# Altium PCB board.pcbdoc
Units mil, origin at the board's own origin, x right, y up, seen from the top; angles counter-clockwise.
Board outline 2650 x 4410 mil, 2 copper layers (Top Layer, Bottom Layer); 12 components, 12 nets, 107 pads, 2 vias.
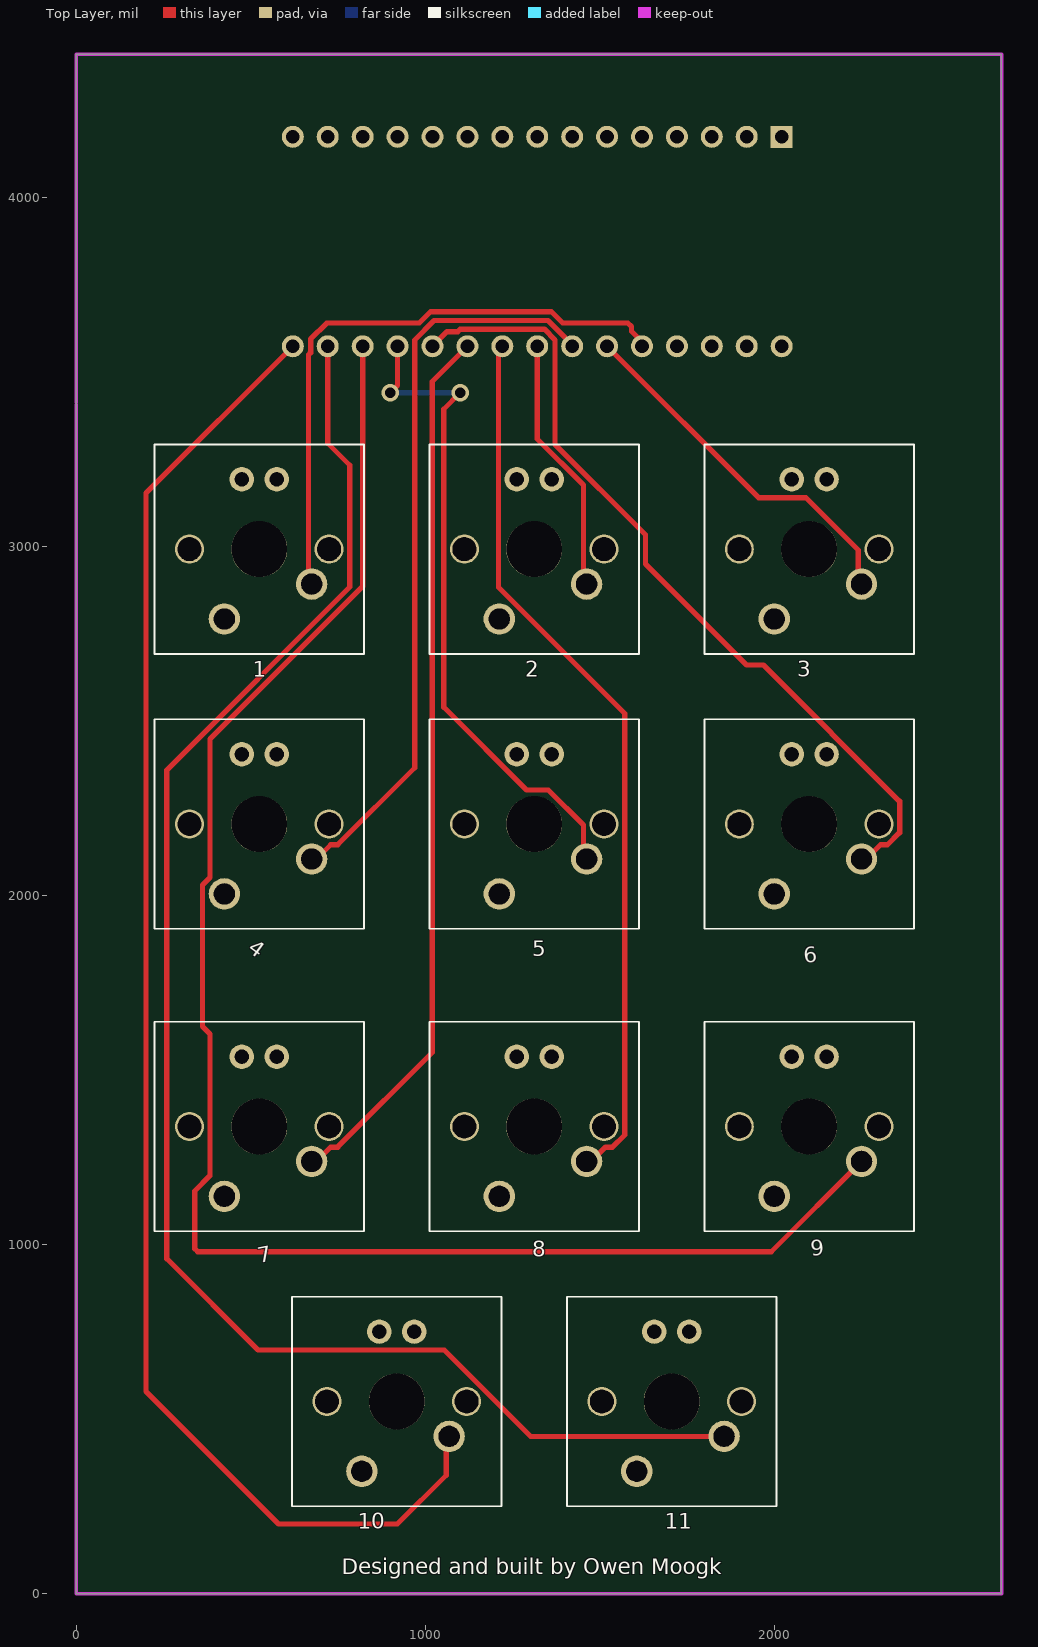
[diagram p0: Top Layer view]
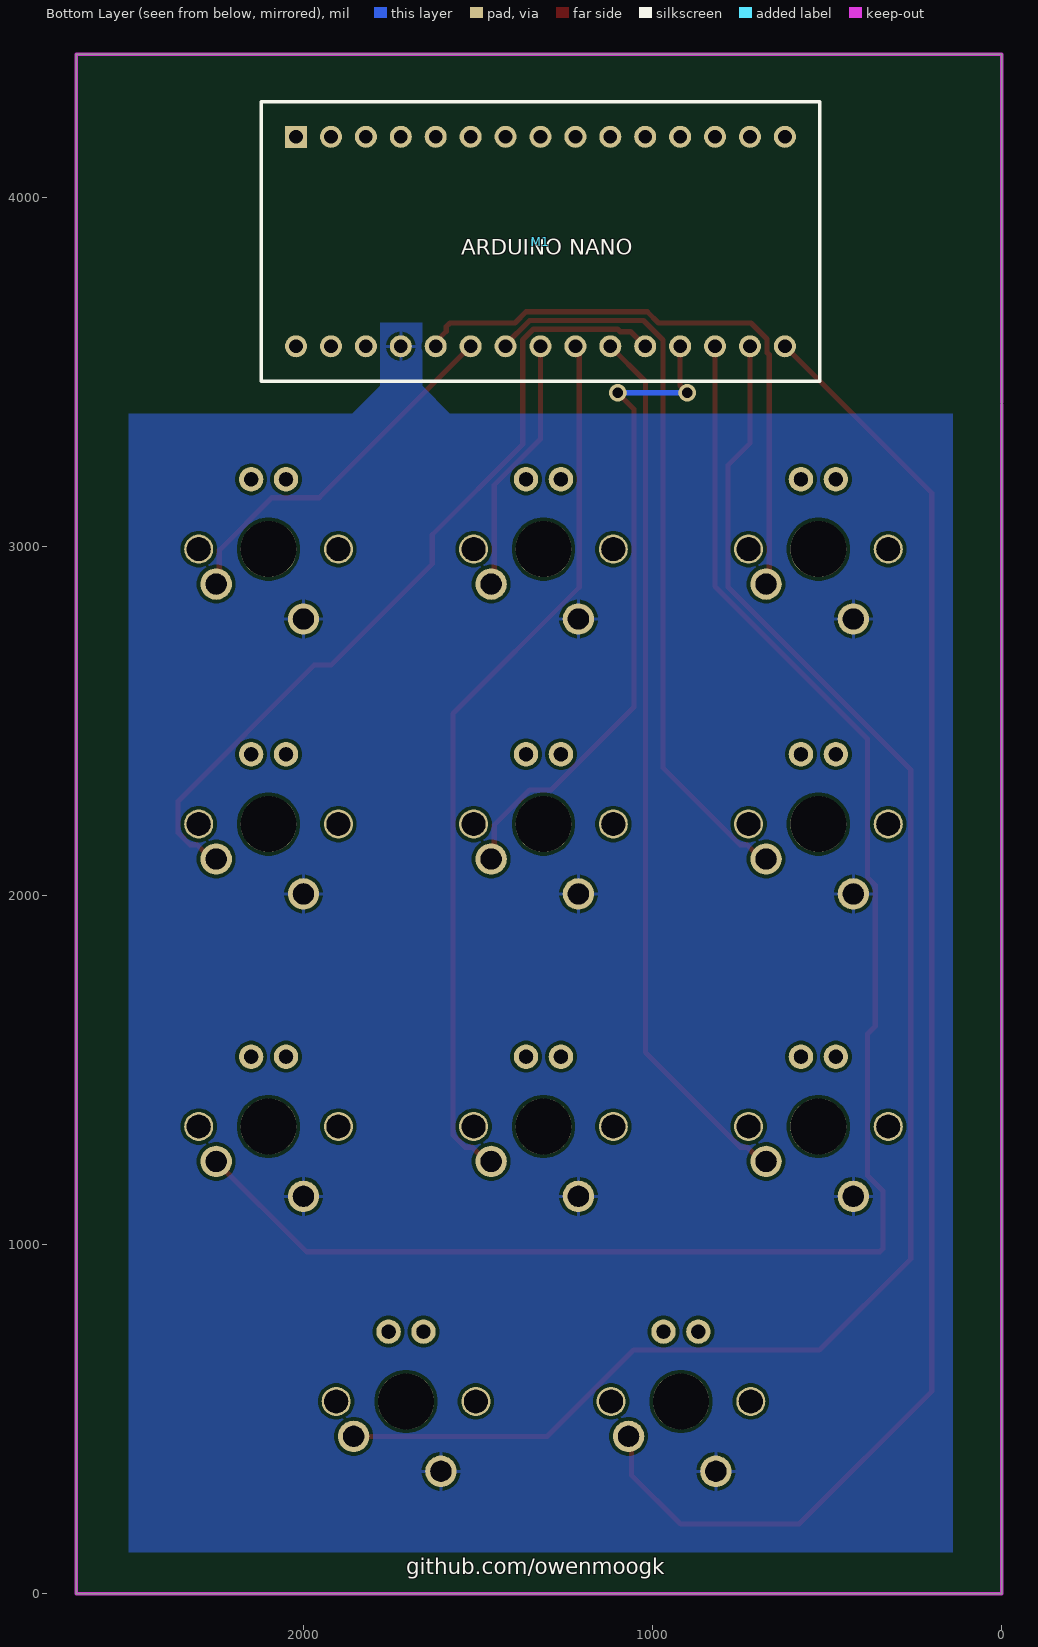
[diagram p1: Bottom Layer view, seen from below]

## Layer stack, top to bottom
Top Solder: solder mask 0.4, Solder Resist, Dk 3.5
Top Layer: signal copper 1.4
Dielectric1: dielectric 12.6, FR-4, Dk 4.8
Bottom Layer: signal copper 1.4
Bottom Solder: solder mask 0.4, Solder Resist, Dk 3.5

## Board outline
0,0 2650,0 2650,4410 0,4410

## Design rules (kind name [scope] priority, off if disabled: settings)
Clearance Clearance_1 [All] p1: gap=10 ignorepadtopadclearanceinfootprint=FALSE
Clearance [All] p2: gap=10 ignorepadtopadclearanceinfootprint=FALSE
HoleSize [All] p1: absolutevalues=TRUE maxlimit=200 minlimit=1 maxpercent=80.000 minpercent=20.000
PolygonConnect [All] p1: connectstyle=Relief reliefconductorwidth=10 reliefentries=4 polygonreliefangle="90 Angle" airgapwidth=10
RoutingVias [All] p1: holewidth=28 width=50 viastyle="Through Hole" minholewidth=28 minwidth=50 maxholewidth=28 maxwidth=50
SolderMaskExpansion [All] p1: expansion=4 istentingtop=FALSE
SupplyNets "Schematic Supply Nets" [InNet('GND')] p1: voltage=0.000
Width [All] p1: maxlimit=30 minlimit=10 preferedwidth=20
29 further rules are at their usual default settings.

## Components (designator, comment, footprint, x,y, rotation, side; value= is the part's Value field where it differs from the comment)
1 "CHERRY-MX-LED" CHERRY-MX-LED 524.68,2992.13 r180 top
2 "CHERRY-MX-LED" CHERRY-MX-LED 1312.08,2992.13 r180 top
3 "CHERRY-MX-LED" CHERRY-MX-LED 2099.48,2992.13 r180 top
4 "CHERRY-MX-LED" CHERRY-MX-LED 524.68,2204.72 r180 top
5 "CHERRY-MX-LED" CHERRY-MX-LED 1312.08,2204.72 r180 top
6 "CHERRY-MX-LED" CHERRY-MX-LED 2099.48,2204.72 r180 top
7 "CHERRY-MX-LED" CHERRY-MX-LED 524.68,1338.58 r180 top
8 "CHERRY-MX-LED" CHERRY-MX-LED 1312.08,1338.58 r180 top
9 "CHERRY-MX-LED" CHERRY-MX-LED 2099.48,1338.58 r180 top
10 "CHERRY-MX-LED" CHERRY-MX-LED 918.38,551.18 r180 top
11 "CHERRY-MX-LED" CHERRY-MX-LED 1705.78,551.18 r180 top
M1 "Arduino Nano" "ARDUINO NANO" 2020.74,4173.23 r270 bottom

## Footprints (in the part's own frame and the unit in brackets; to place one, negate y for a bottom-side part, rotate by r counter-clockwise, add the part's x,y. Pads: shape width x height; smd on the part's side, far side on the other; paste and mask are expansions set on the pad)
"ARDUINO NANO" [mm]
  rect 1.6x1.6 hole 1 paste-2539.97 mask+0.102: 1(0,0)
  round 1.6 hole 1 paste-2539.97 mask+0.102: 2(0,2.54) 3(0,5.08) 4(0,7.62) 5(0,10.16) 6(0,12.7) 7(0,15.24) 8(0,17.78) 9(0,20.32) 10(0,22.86) 11(0,25.4) 12(0,27.94) 13(0,30.48) 14(0,33.02) 15(0,35.56) 16(15.24,35.56) 17(15.24,33.02) 18(15.24,30.48) 19(15.24,27.94) 20(15.24,25.4) 21(15.24,22.86) 22(15.24,20.32) 23(15.24,17.78) 24(15.24,15.24) 25(15.24,12.7) 26(15.24,10.16) 27(15.24,7.62) 28(15.24,5.08) 29(15.24,2.54) 30(15.24,0)
  silkscreen extent -2.54,-2.54 17.78,38.1
CHERRY-MX-LED [mil]
  round 70 hole 40 slot 40.2 at 0 deg paste-99999 mask+4: LED+(-50,-200) LED-(50,-200)
  round 83.24 hole 67.5 slot 67.7 at 0 deg paste-99999 mask+4: P$3(-200,0) P$4(200,0)
  round 90 hole 60 slot 60.2 at 0 deg paste-99999 mask+4: SW1(-150,100) SW2(100,200)
  round 160 hole 160 unplated paste-99999: ""(0,0.01)
  silkscreen extent -300,-300 300,300

## Part data
1 2 3 4 5 6 7 8 9 10 11: Contributor=spaceman35, spicePre=?, spiceSymbolName=CHERRY-MX-LED
M1: Contributor=hctan22, Manufacturer Part="Arduino Nano", spicePre=M, spiceSymbolName="Arduino Nano"

## Via types
v1: diameter 50, hole 30, Top Layer to Bottom Layer, 2 vias

## Nets (pads, with @x,y where several pads share a name; then routed paths per layer and width w, separated by ;. In a path a pad name is that pad's centre, name@x,y a point inside that pad or via, vN(x,y) a via of type N, cw(c..) or ccw(c..) an arc to the next point about the centre after c; other vN are vias at no path point)
GND: 1.SW2 2.SW2 3.SW2 4.SW2 5.SW2 6.SW2 7.SW2 8.SW2 9.SW2 10.SW2 11.SW2 M1.27
Net1_SW1: 1.SW1 M1.26 | length 1745.6
  Top Layer w15: 1.SW1 665.56,2901.25 665.56,3548.75 671.75,3554.94 671.75,3593.52 718.23,3640 982.87,3640 1015.09,3672.22 1361.75,3672.22 1393.97,3640 1580,3640 1590.61,3629.39 1590.61,3616.35 1620.74,3586.21 M1.26
Net2_SW1: 2.SW1 M1.23 | length 739.6
  Top Layer w15: M1.23 1320.74,3307.71 1452.96,3175.49 1452.96,2901.25 2.SW1
Net3_SW1: 3.SW1 M1.25 | length 1062.3
  Top Layer w15: M1.25 1954.35,3139.63 2089.86,3139.63 2240.36,2989.12 2240.36,2901.25 3.SW1
Net4_SW1: 4.SW1 M1.24 | length 2136.1
  Top Layer w15: 4.SW1 688.38,2104.72 729.26,2145.6 749.17,2145.6 969.74,2366.17 969.74,3591.51 1025.45,3647.22 1351.39,3647.22 1420.74,3577.87 M1.24
Net5_SW1: 5.SW1 M1.19 | length 1902.4
  Top Layer w15: v1(900,3440) 920.74,3460.74 M1.19 ; v1(1100,3440) 1052.96,3392.96 1052.96,2539.6 1290.34,2302.22 1352.47,2302.22 1452.96,2201.72 1452.96,2113.84 5.SW1
  Bottom Layer w15: v1(900,3440) v1(1100,3440)
Net6_SW1: 6.SW1 M1.20 | length 2372.8
  Top Layer w15: M1.20 1062.52,3615 1093.23,3615 1100.45,3622.22 1341.04,3622.22 1371.75,3591.51 1371.75,3292.06 1630.52,3033.29 1630.52,2949.48 1920,2660 1968.45,2660 2358.6,2269.85 2358.6,2180.24 2323.97,2145.6 2304.06,2145.6 2263.18,2104.72 6.SW1
Net7_SW1: 7.SW1 M1.21 | length 2539.1
  Top Layer w15: 7.SW1 688.38,1238.58 729.26,1279.46 749.17,1279.46 1020,1550.29 1020,3472.48 M1.21
Net8_SW1: 8.SW1 M1.22 | length 2553.9
  Top Layer w15: M1.22 1220.74,3560.24 1209.58,3549.08 1209.58,2883.01 1571.2,2521.39 1571.2,1314.09 1536.57,1279.46 1516.66,1279.46 1475.78,1238.58 8.SW1
Net9_SW1: 9.SW1 M1.18 | length 4821.7
  Top Layer w15: M1.18 820.74,2885.39 383.8,2448.45 383.8,2052.23 362.18,2030.61 362.18,1625.03 383.8,1603.41 383.8,1197.83 340,1154.03 340,988.79 348.79,980 1990.9,980 9.SW1
Net10_SW1: 10.SW1 M1.16 | length 4357.5
  Top Layer w15: M1.16 200,3152.48 200,580 580,200 920,200 1060,340 1060,442.8 10.SW1
Net11_SW1: 11.SW1 M1.17 | length 4662.9
  Top Layer w15: M1.17 720.74,3295.47 783.8,3232.41 783.8,2883.8 260,2360 260,960 521.32,698.68 1054.49,698.68 1301.99,451.18 11.SW1
pads on no net: 1. 1.LED+ 1.LED- 1.P$3 1.P$4 2. 2.LED+ 2.LED- 2.P$3 2.P$4 3. 3.LED+ 3.LED- 3.P$3 3.P$4 4. 4.LED+ 4.LED- 4.P$3 4.P$4 5. 5.LED+ 5.LED- 5.P$3 5.P$4 6. 6.LED+ 6.LED- 6.P$3 6.P$4 7. 7.LED+ 7.LED- 7.P$3 7.P$4 8. 8.LED+ 8.LED- 8.P$3 8.P$4 9. 9.LED+ 9.LED- 9.P$3 9.P$4 10. 10.LED+ 10.LED- 10.P$3 10.P$4 11. 11.LED+ 11.LED- 11.P$3 11.P$4 M1.1 M1.2 M1.3 M1.4 M1.5 M1.6 M1.7 M1.8 M1.9 M1.10 M1.11 M1.12 M1.13 M1.14 M1.15 M1.28 M1.29 M1.30

## Polygon pours and split planes (outlines as drawn)
GND on Bottom Layer "GND_L02_P000" (solid, pour order 0): 1580,3380 1660,3460 1660,3640 1780,3640 1780,3460 1860,3380 2500,3380 2500,120 140,120 140,3380

## Keep-outs
Keep-Out Layer:
  lines w10: 0,0 0,1596.5 ; 0,0 2650.7,0 ; 0,0 2650.7,0 ; 0,0 0,1596.5 ; 0,1596.5 0,3407.6 0,1596.5 ; 0,4409.4 2650.7,4409.4 ; 0,4409.4 0,3413.2 0,4409.4 ; 0,4409.4 2650.7,4409.4 ; 2650.7,0 2650.7,4409.4 ; 2650.7,0 2650.7,4409.4

## Silkscreen, mask and mechanical layers (free items; w line width, h text height)
Top Overlay:
  text "Designed and built by Owen Moogk" at 760.9,56.24 h45
Bottom Overlay:
  text "ARDUINO NANO" at 1548.3,3835.77 h45
  text "github.com/owenmoogk" at 1705.78,56.24 h45
Board Outline:
  the board outline again, w10